# Altium PCB debug_board.PcbDoc
Units mm, origin at the board's own origin, x right, y up, seen from the top; angles counter-clockwise.
Board outline 29.5 x 15 mm, 2 copper layers (Top Layer, Bottom Layer); 5 components, 10 nets, 34 pads, 2 vias.
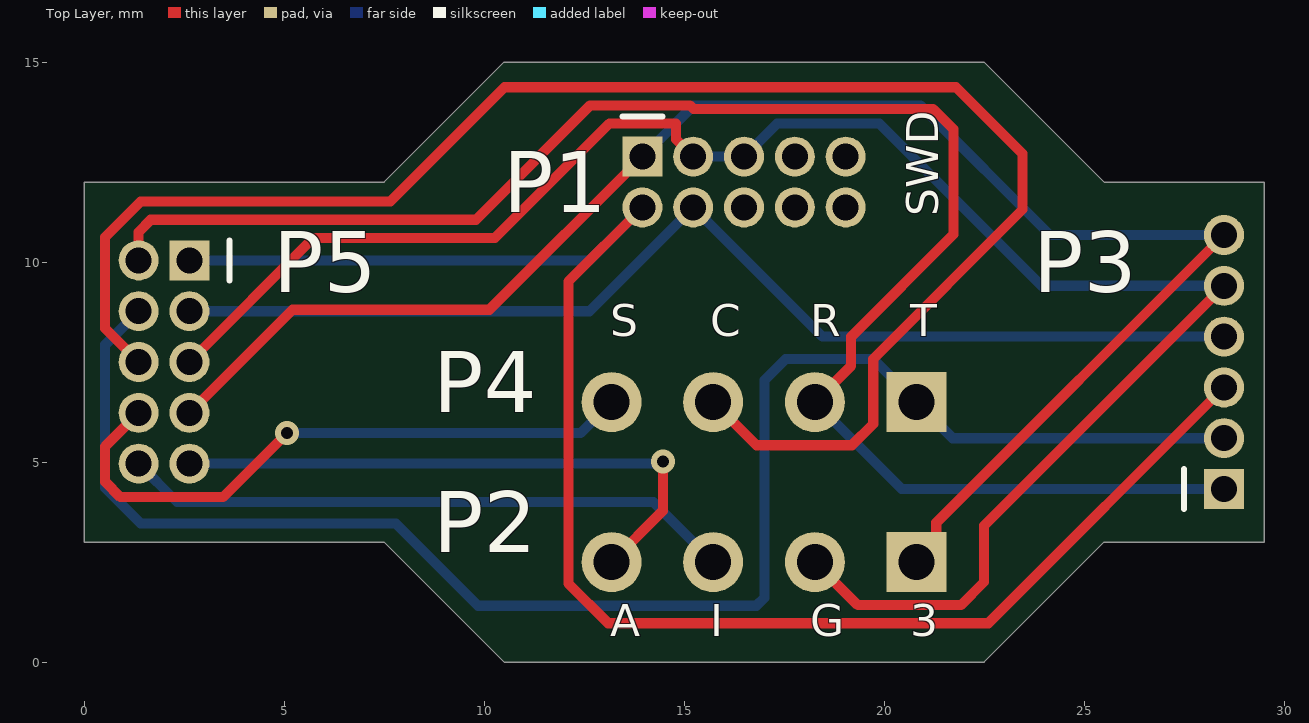
[diagram p0: Top Layer view]
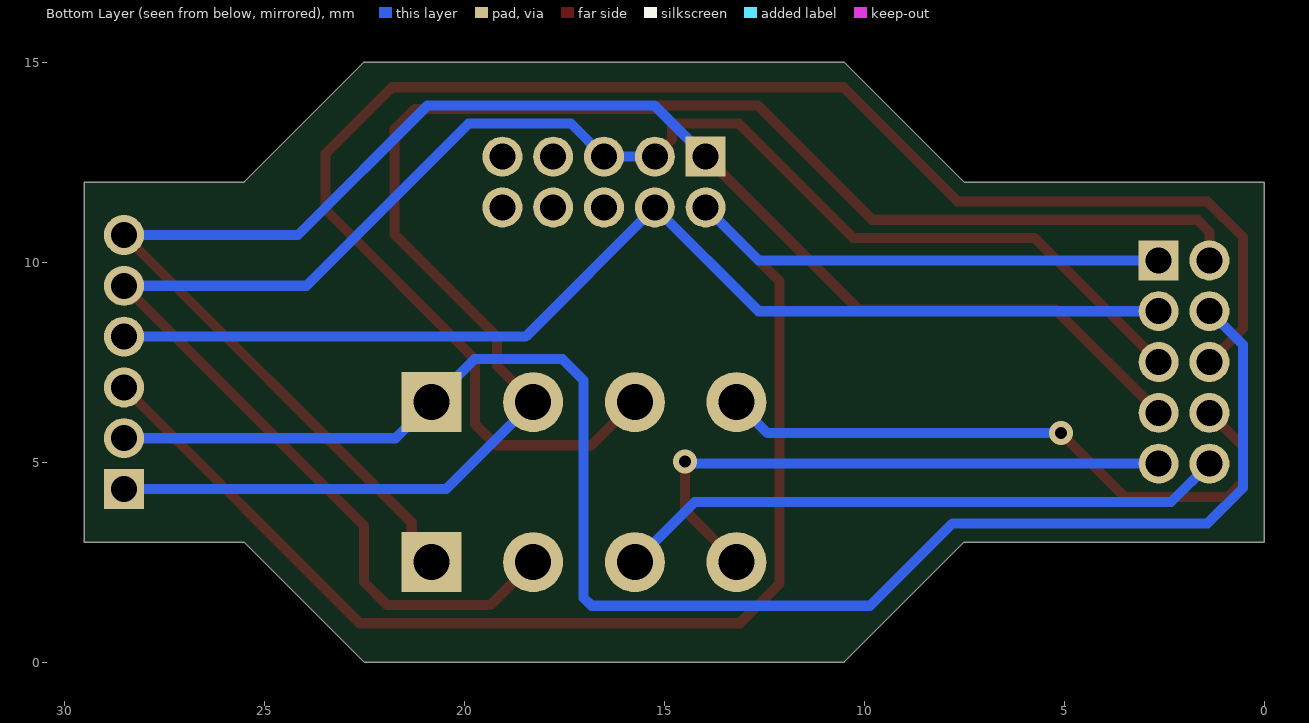
[diagram p1: Bottom Layer view, seen from below]

## Layer stack, top to bottom
Top Solder: solder mask 0.0102, Solder Resist, Dk 3.5
Top Layer: signal copper 0.0356
Dielectric 1: dielectric 0.32, FR-4, Dk 4.8
Bottom Layer: signal copper 0.0356
Bottom Solder: solder mask 0.0102, Solder Resist, Dk 3.5

## Board outline
0,3 0,12 7.5,12 10.5,15 22.5,15 25.5,12 29.5,12 29.5,3 25.5,3 22.5,0 10.5,0 7.5,3

## Design rules (kind name [scope] priority, off if disabled: settings)
Clearance [All] p1: gap=0.254 ignorepadtopadclearanceinfootprint=FALSE except(0: Arc-Hole Track-Hole SMDPad-Hole THPad-Hole Via-Hole Fill-Hole Poly-Hole Region-Hole Text-Hole; 0.2: Arc-Arc Arc-Track Arc-SMDPad Arc-THPad Track-Track Track-SMDPad Track-THPad)
PolygonConnect [All] p1: connectstyle=Relief reliefconductorwidth=0.254 reliefentries=4 polygonreliefangle="90 Angle" airgapwidth=0.254
RoutingVias [All] p1: holewidth=0.711 width=1.27 viastyle="Through Hole" minholewidth=0.2 minwidth=0.4 maxholewidth=0.711 maxwidth=1.27
SolderMaskExpansion [All] p1: expansion=0.102 istentingtop=FALSE
Width [All] p1: maxlimit=0.254 minlimit=0.254 preferedwidth=0.254
30 further rules are at their usual default settings.

## Components (designator, comment, footprint, x,y, rotation, side; value= is the part's Value field where it differs from the comment)
P1 "SWD Connector" "1_27-5x2 Female Right Angle" 16.5,12 r0 top
P2 "CONN_2-54_4x1" 2_54-4x1_FEMALE_HEADER_THT 17,2.5 r180 top
P3 "Daughterboard Connector" 1_27-6x1-MALE_HEADER_RIGHT_THT 28.5,7.5 r90 top
P4 "CONN_2-54_4x1" 2_54-4x1_FEMALE_HEADER_THT 17,6.5 r180 top
P5 "Motherboard Connector" "1_27-5x2 Female Right Angle" 2,7.5 r270 top

## Footprints (in the part's own frame and the unit in brackets; to place one, negate y for a bottom-side part, rotate by r counter-clockwise, add the part's x,y. Pads: shape width x height; smd on the part's side, far side on the other; paste and mask are expansions set on the pad)
"1_27-5x2 Female Right Angle" [mm]
  rect 1x1 hole 0.65 unplated mask+0.05: 1(-2.54,0.635)
  round 1 hole 0.65 unplated mask+0.05: 2(-2.54,-0.635) 3(-1.27,0.635) 4(-1.27,-0.635) 5(0,0.635) 6(0,-0.635) 7(1.27,0.635) 8(1.27,-0.635) 9(2.54,0.635) 10(2.54,-0.635)
  silkscreen extent -3.04,1.63 -2.04,1.63
1_27-6x1-MALE_HEADER_RIGHT_THT [mm]
  rect 1x1 hole 0.65 unplated mask+0.05: 1(-3.175,0)
  round 1 hole 0.65 unplated mask+0.05: 2(-1.905,0) 3(-0.635,0) 4(0.635,0) 5(1.905,0) 6(3.175,0)
  silkscreen extent -3.67,1 -2.67,1
2_54-4x1_FEMALE_HEADER_THT [mm]
  rect 1.5x1.5 hole 0.9 unplated mask+0.05: 1(-3.81,0)
  round 1.5 hole 0.9 unplated mask+0.05: 2(-1.27,0) 3(1.27,0) 4(3.81,0)

## Part data
P1 P5: library part CONN_1-27_5x2, "1.27mm pitch 5x2 pin male connector"
P3: library part CONN_1-26_6x1

## Via types
v1: diameter 0.6, hole 0.3, Top Layer to Bottom Layer, 2 vias

## Nets (pads, with @x,y where several pads share a name; then routed paths per layer and width w, separated by ;. In a path a pad name is that pad's centre, name@x,y a point inside that pad or via, vN(x,y) a via of type N, cw(c..) or ccw(c..) an arc to the next point about the centre after c; other vN are vias at no path point)
3V3: P1.1 P2.1 P3.6 P5.7 | length 41.8
  Top Layer w0.254: P5.7 5.213,8.808 10.133,8.808 P1.1 ; P2.1 21.307,2.997 21.307,3.482 P3.6
  Bottom Layer w0.254: P1.1 15.241,13.916 20.909,13.916 24.15,10.675 P3.6
ADC: P2.4 P5.9 | length 14.9
  Top Layer w0.254: P2.4 14.472,3.782 v1(14.472,5.012)
  Bottom Layer w0.254: P5.9 14.42,4.96 v1(14.472,5.012)
GND: P1.3 P1.5 P2.2 P3.5 P5.5 | length 45.7
  Top Layer w0.254: P5.5 5.738,10.603 10.274,10.603 13.133,13.462 14.802,13.462 14.802,13.063 P1.3 ; P2.2 19.347,1.423 21.923,1.423 22.5,2 22.5,3.405 P3.5
  Bottom Layer w0.254: P1.3 P1.5 17.327,13.462 19.882,13.462 23.939,9.405 P3.5
I2C_SCL: P4.4 P5.8 | length 15.9
  Top Layer w0.254: P5.8 0.527,5.392 0.527,4.504 0.908,4.123 3.473,4.123 v1(5.074,5.723)
  Bottom Layer w0.254: v1(5.074,5.723) 12.413,5.723 P4.4
I2C_SDA: P4.3 P5.6 | length 41.6
  Top Layer w0.254: P5.6 0.527,8.338 0.527,10.625 1.416,11.514 7.657,11.514 10.512,14.37 21.801,14.37 23.463,12.708 23.463,11.311 19.729,7.577 19.729,5.952 19.196,5.418 16.812,5.418 P4.3
INT: P2.3 P5.10 | length 15.4
  Bottom Layer w0.254: P5.10 2.325,4 14.23,4 P2.3
SWDCLK: P1.4 P3.4 P5.3 | length 28.3
  Bottom Layer w0.254: P5.3 12.635,8.77 P1.4 18.46,8.135 P3.4
SWDIO: P1.2 P3.3 P5.1 | length 41.3
  Top Layer w0.254: P1.2 12.109,9.514 12.109,1.964 13.104,0.969 22.604,0.969 P3.3
  Bottom Layer w0.254: P5.1 12.635,10.04 P1.2
UART_RX: P3.2 P4.1 P5.4 | length 40.5
  Bottom Layer w0.254: P5.4 0.527,7.932 0.527,4.352 1.416,3.463 7.791,3.463 9.849,1.405 16.808,1.405 17.012,1.608 17.012,7.044 17.545,7.577 19.733,7.577 P4.1 21.715,5.595 P3.2
UART_TX: P3.1 P4.2 P5.2 | length 42
  Top Layer w0.254: P5.2 1.365,10.752 1.67,11.057 9.798,11.057 12.657,13.916 15.151,13.916 15.241,13.826 21.228,13.826 21.736,13.318 21.736,10.692 19.177,8.133 19.177,7.407 P4.2
  Bottom Layer w0.254: P4.2 20.445,4.325 P3.1
pads on no net: P1.6 P1.7 P1.8 P1.9 P1.10

## Silkscreen, mask and mechanical layers (free items; w line width, h text height)
Top Overlay:
  text "SWD" at 21.35,11.15 h0.8 r90
  text "S" at 13.15,8.15 h0.8
  text "C" at 15.65,8.15 h0.8
  text "R" at 18.15,8.15 h0.8
  text "T" at 20.65,8.15 h0.8
  text "A" at 13.15,0.65 h0.8
  text "I" at 15.65,0.65 h0.8
  text "G" at 18.15,0.65 h0.8
  text "3" at 20.65,0.65 h0.8
Mechanical 1:
  the board outline again, w0.15